# Altium PCB wifi.PcbDoc (part 2 of 2)
Units mm, origin at the board's own origin, x right, y up, seen from the top; angles counter-clockwise.
Board outline 104 x 32.68 mm, 4 copper layers (Top Layer, Int1 (GND), Int2 (PWR), GND), stack 1.369 mm thick; 67 components, 46 nets, 270 pads, 286 vias.
Unrouted connection lines stored in the file: 2.
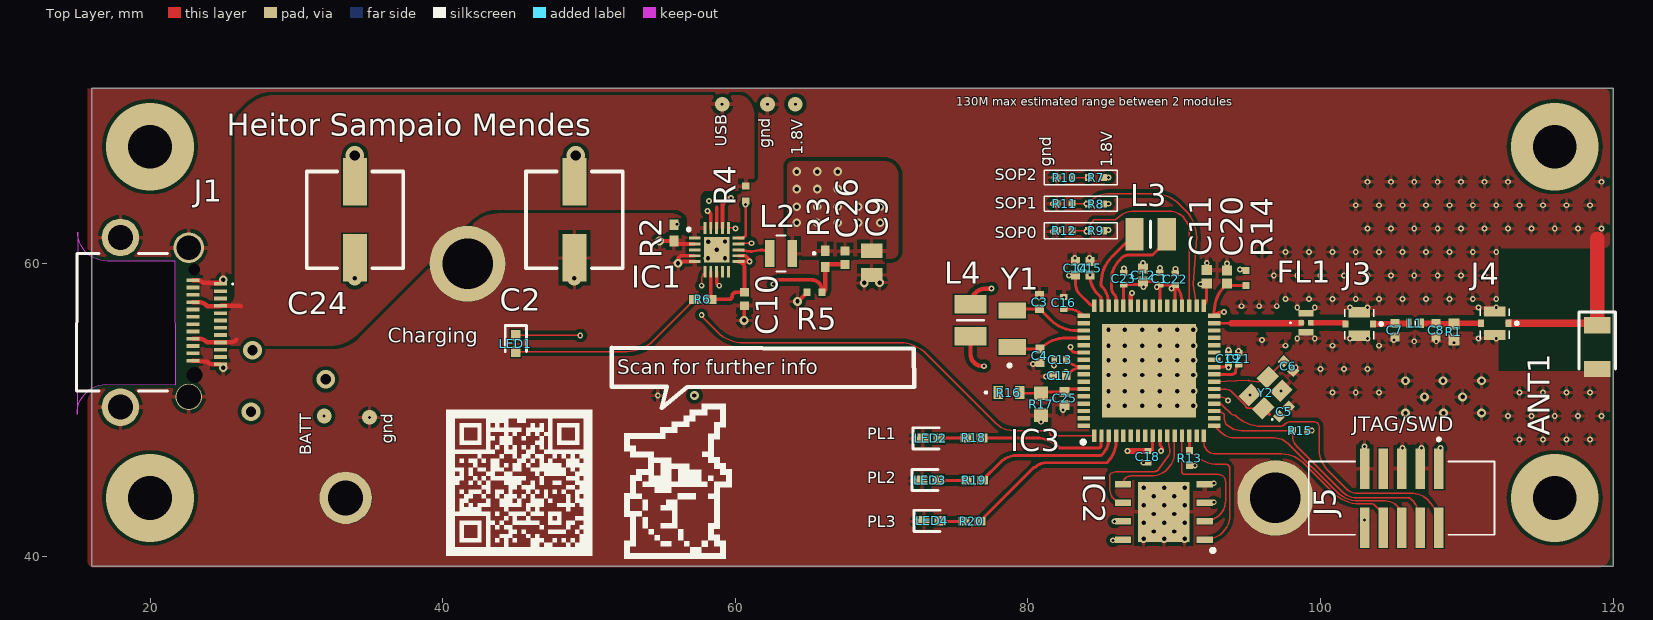
[diagram p0: Top Layer view]

## Polygon pours and split planes (outlines as drawn) (continued)
GND on Int1 (GND) (split plane): 119.49,61.1 112.4,61.1 112.4,52.7 119.49,52.7 119.49,39.83 16.52,39.83 16.517,51.154 16.564,51.174 16.862,51.238 17.004,51.246 21.738,51.23 21.739,51.23 21.74,51.23 21.789,51.234 21.838,51.239 21.839,51.239 21.886,51.254 21.933,51.268 21.934,51.268 21.935,51.268 21.978,51.292 22.022,51.315 22.023,51.315 22.023,51.316 22.062,51.347 22.099,51.378 22.1,51.379 22.101,51.379 22.132,51.417 22.163,51.455 22.164,51.456 22.187,51.5 22.211,51.543 22.211,51.544 22.211,51.545 22.226,51.592 22.24,51.639 22.24,51.64 22.24,51.641 22.245,51.689 22.25,51.738 22.25,51.739 22.25,51.74 22.249,60.172 22.244,60.22 22.239,60.27 22.239,60.271 22.225,60.318 22.21,60.366 22.21,60.367 22.187,60.411 22.163,60.455 22.131,60.494 22.1,60.532 22.1,60.533 22.062,60.564 22.023,60.596 22.022,60.596 21.979,60.619 21.935,60.643 21.934,60.643 21.887,60.657 21.839,60.672 21.838,60.672 21.789,60.677 21.739,60.682 17.097,60.688 16.947,60.694 16.648,60.749 16.514,60.802 16.511,71.49 119.49,71.49

## Other copper
Top Layer:
  pour cut-out: 101.944,56.464 ccw(c102.016,56.536) 102.016,56.435 103.364,56.435 103.364,55.34 101.917,55.34 101.917,56.399 cw(c102.009,56.399)
  pour cut-out: 111.177,56.477 cw(c111.232,56.422) 111.232,56.5 112.6,56.5 112.6,55.4 cw(c112.558,55.442) 112.558,55.383 111.177,55.383
  pour cut-out: 84.347,56.612 84.347,48.762 92.197,48.762 92.197,56.612
GND:
  region: 28.1,74.3
Int1 (GND) (plane layer: these items are gaps in the copper):
  rectangle: 112.4,52.7 120,61.1

## Silkscreen, mask and mechanical layers (free items; w line width, h text height)
Top Overlay:
  drawing of 276 lines, arcs and shapes, not listed
  text "130M max estimated range between 2 modules" at 75.1,70.588 h1
  text "Heitor Sampaio Mendes" at 25.254,68.762 h1.52
  text "USB" at 59.4,68 h0.8 r90
  text "gnd" at 62.4,67.9 h0.8 r90
  text "1.8V" at 64.6,67.4 h0.8 r90
  text "gnd" at 81.606,66.637 h0.8 r90
  text "1.8V" at 85.747,66.59 h0.8 r90
  text "SOP2" at 77.732,65.7 h0.8
  text "SOP1" at 77.733,63.77 h0.8
  text "SOP0" at 77.74,61.76 h0.8
  text "Charging" at 36.254,54.587 h1
  text "Scan for further info" at 51.934,52.444 h1
  text "JTAG/SWD" at 102.154,48.554 h1
  text "PL1" at 69,48 h0.8
  text "gnd" at 36.6,47.7 h0.8 r90
  text "BATT" at 31,46.9 h0.8 r90
  text "PL2" at 69,45 h0.8
  text "PL3" at 69,42 h0.8
Bottom Overlay:
  rectangle: 83.108,62.35 102.158,66.7
  rectangle: 83.068,67.7 102.118,72
  text "S/N" at 108.26,68.676 h1.91
  text "REV" at 108.3,63.7 h1.91
  text "-" at 99.746,52.746 h2 r180
  text "18650" at 68.746,51.254 h1.52
  text "Temp sense" at 52.746,50.887 h1